# Altium PCB Power Board Schematic - Backup.PcbDoc
Units mm, origin at the board's own origin, x right, y up, seen from the top; angles counter-clockwise.
Board outline 74.35 x 72.78 mm, 2 copper layers (Top Copper, Bottom Copper), stack 1.567 mm thick; 34 components, 27 nets, 118 pads, 6 vias.
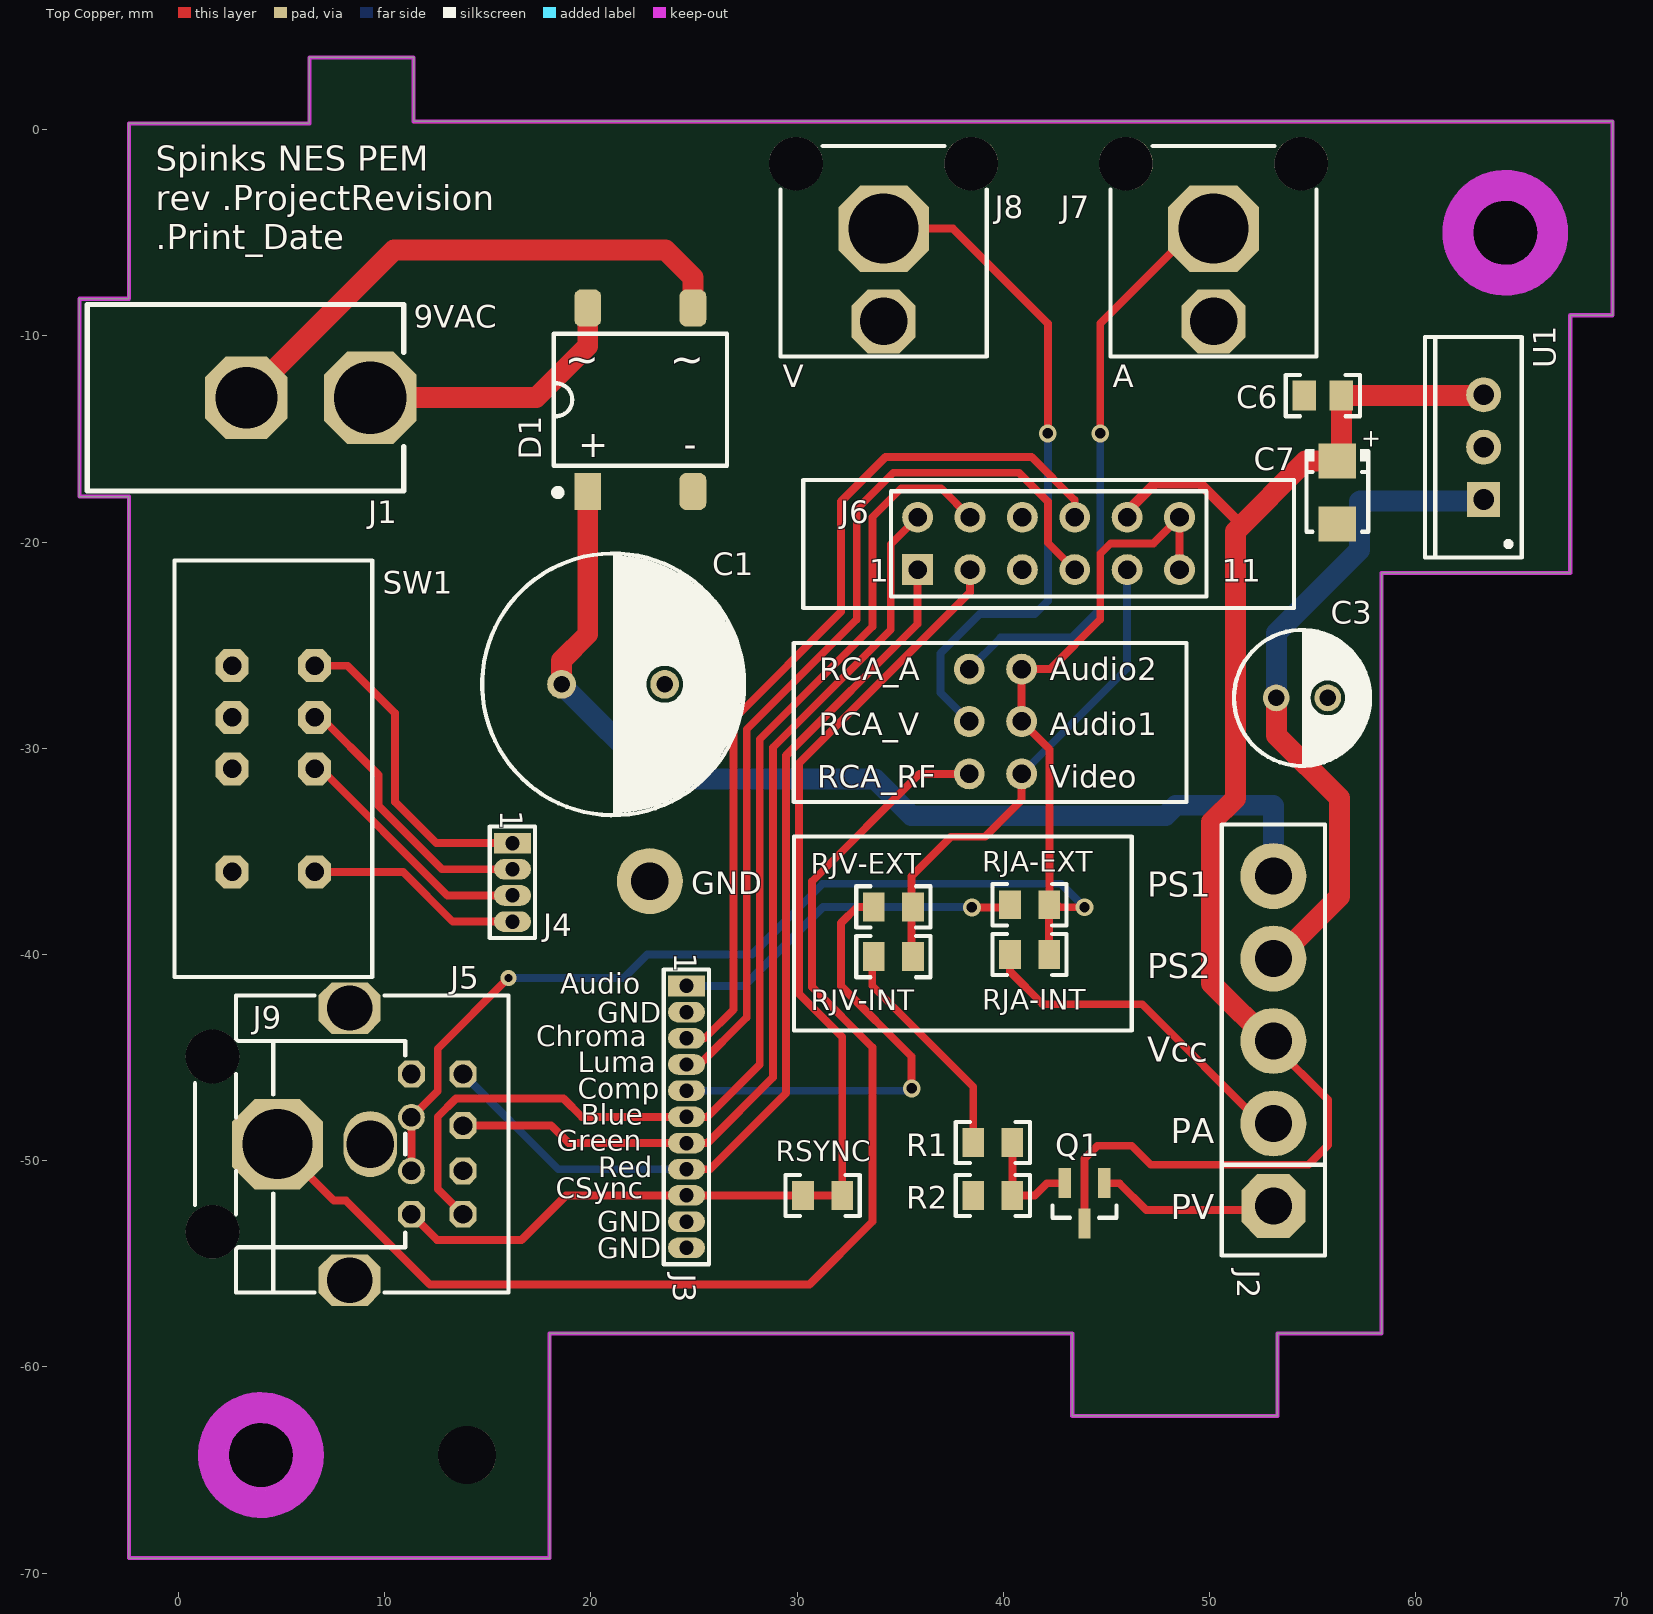
[diagram p0: Top Copper view]
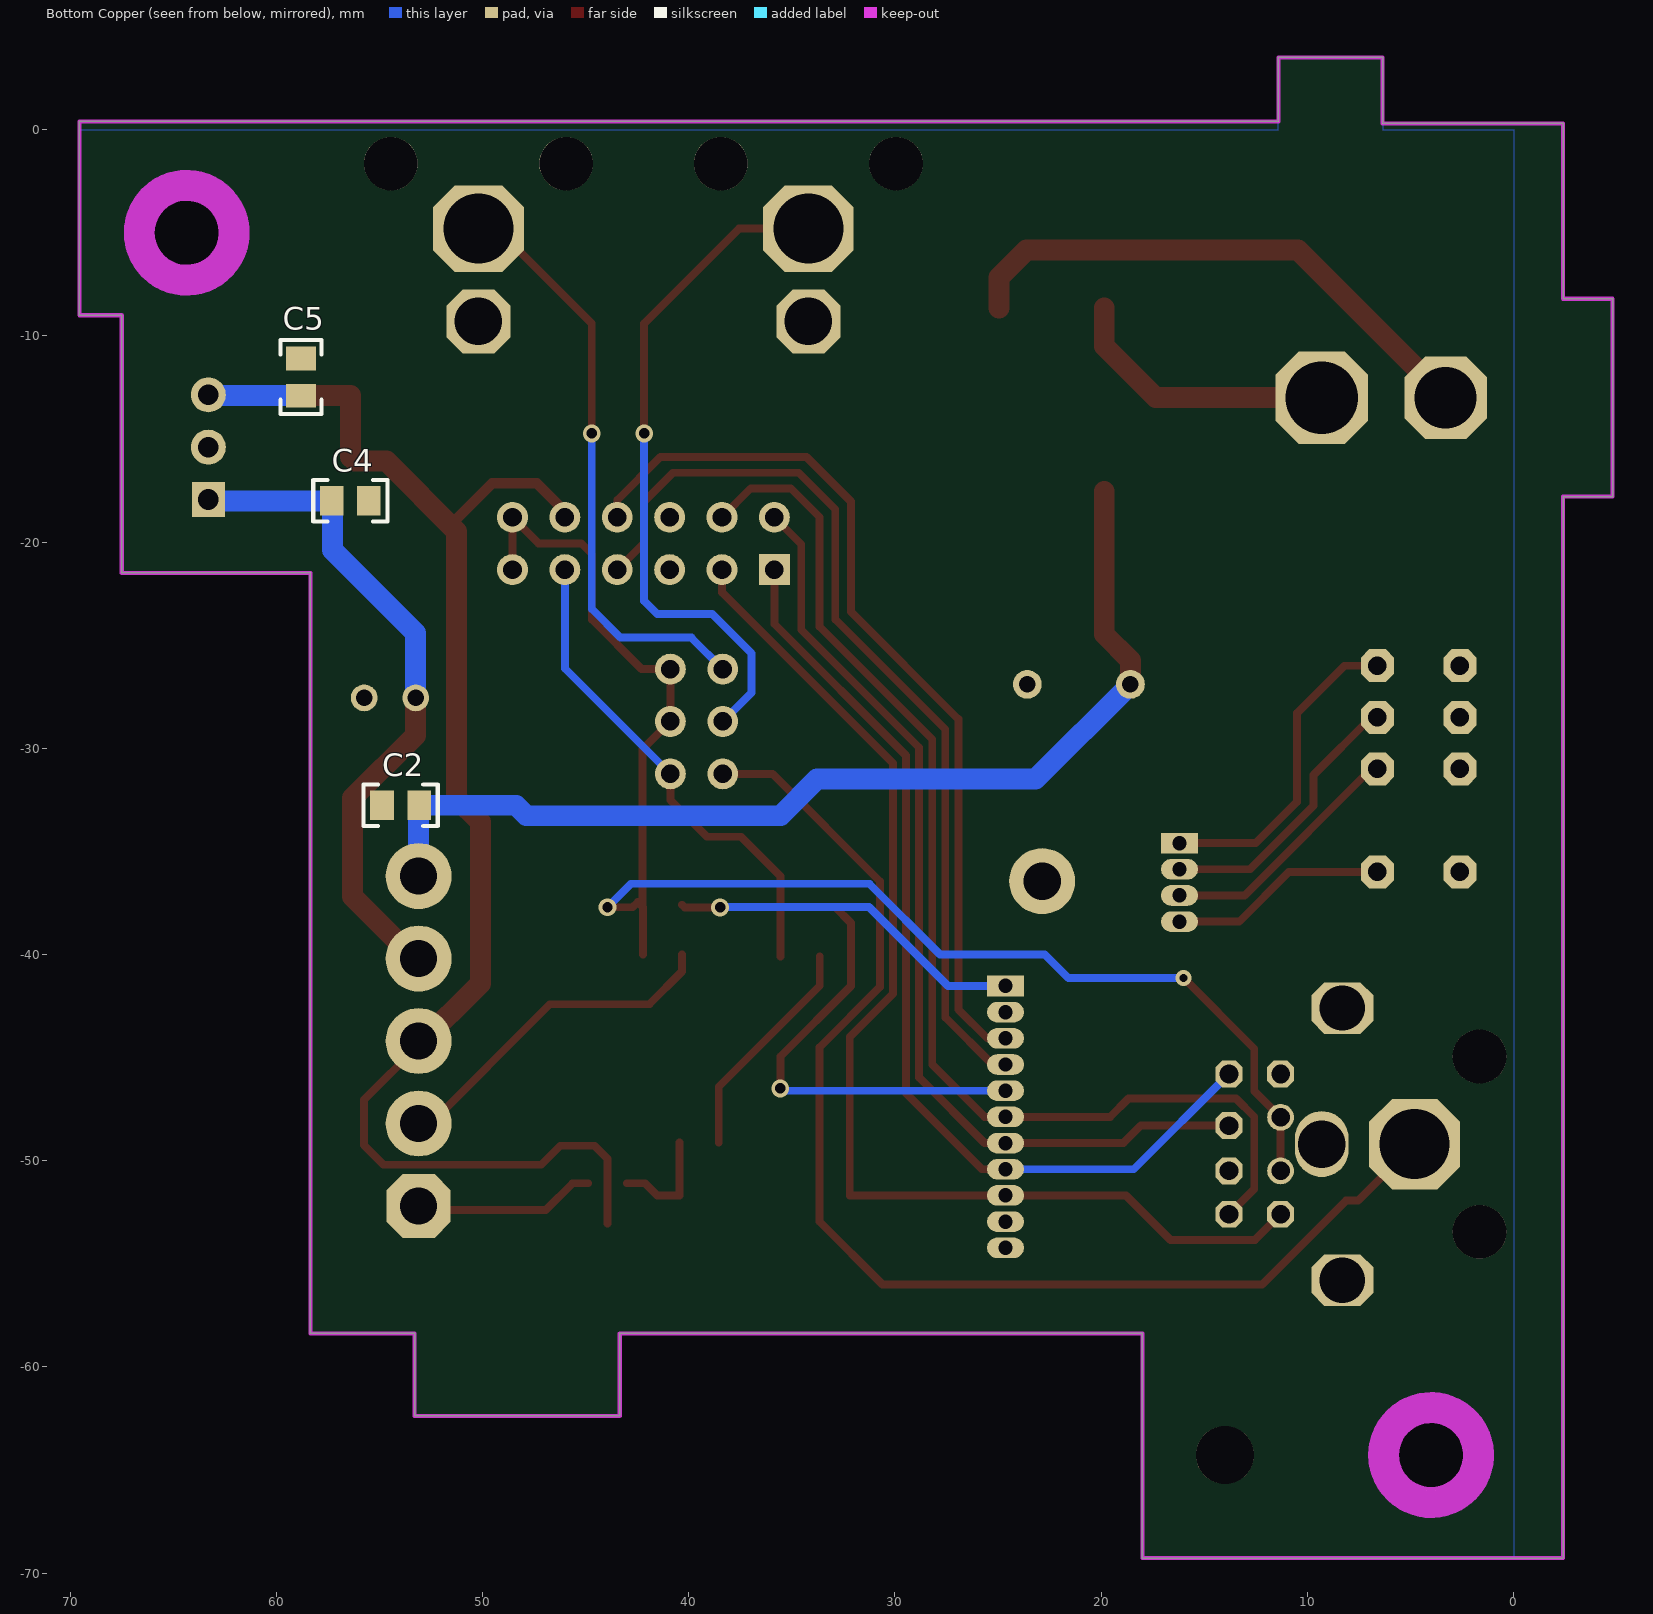
[diagram p1: Bottom Copper view, seen from below]
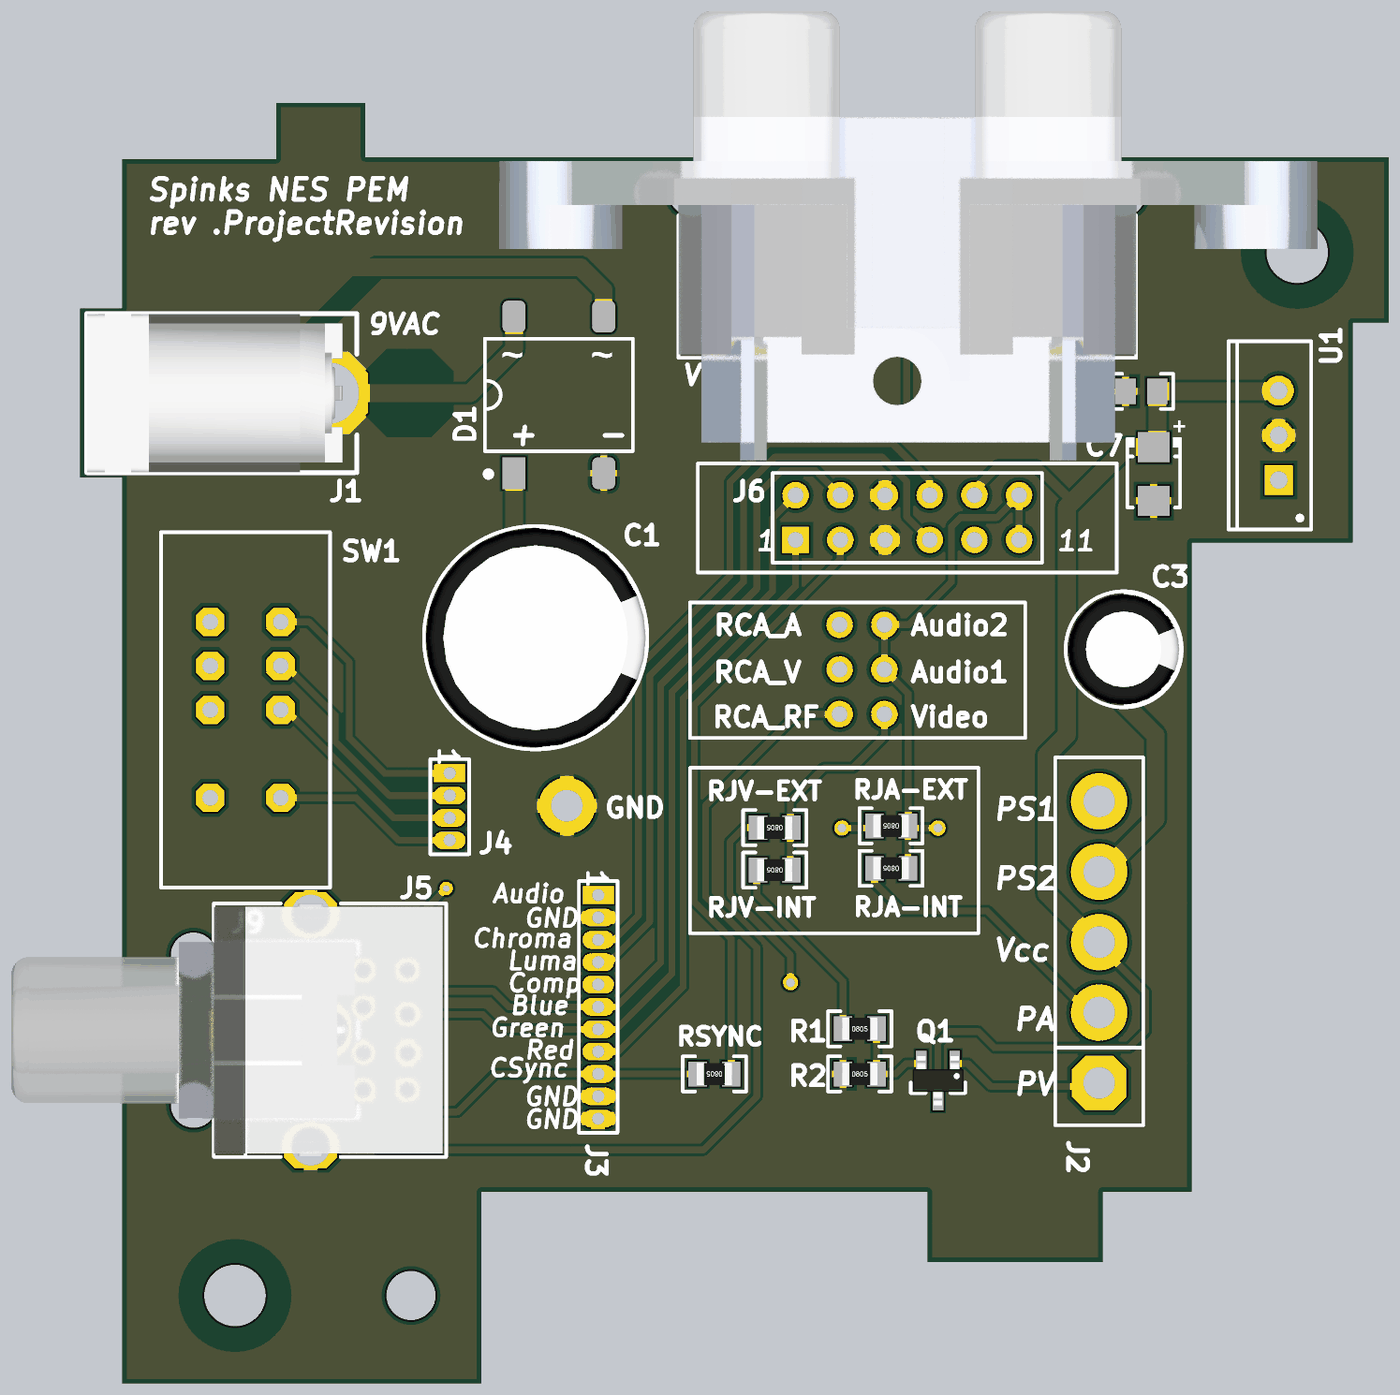
[diagram p2: 3D render of the assembled board from above, using the file's embedded part models]

## Layer stack, top to bottom
Top Solder Mask: solder mask 0.0102, Solder Resist, Dk 3.5
Top Copper: signal copper 0.0343
Dielectric 1: core 1.4986, FR-4, Dk 4.2
Bottom Copper: signal copper 0.0343
Bottom Solder Mask: solder mask 0.0102, Solder Resist, Dk 3.5

## Board outline
-2.4,-69.28 -2.4,-17.8 -4.8,-17.8 -4.8,-8.2 -2.4,-8.2 -2.4,0.3 6.35,0.3 6.35,3.5 11.4,3.5 11.4,0.4 69.55,0.4 69.55,-9 67.5,-9 67.5,-21.5 58.35,-21.5 58.35,-58.38 53.3,-58.38 53.3,-62.38 43.35,-62.38 43.35,-58.38 18,-58.38 18,-69.28

## Design rules (kind name [scope] priority, off if disabled: settings)
Clearance [All] p1: gap=0.152 except(0.267: THPad-Poly THPad-Region)
HoleSize [All] p1: absolutevalues=TRUE maxlimit=2.54 minlimit=0.381 maxpercent=80.000 minpercent=20.000
MinimumAnnularRing Via [IsVia] p1: minimumring=0.127
MinimumAnnularRing "Through Hole" [All] p2: minimumring=0.178
PolygonConnect "Via To Polygon" [IsVia] p1: connectstyle=Direct reliefconductorwidth=0.254 reliefentries=4 polygonreliefangle="90 Angle" airgapwidth=0.254
PolygonConnect "Pad to Polygon" [IsPad AND NOT OnMultiLayer] p2: connectstyle=Relief reliefconductorwidth=0.381 reliefentries=4 polygonreliefangle="90 Angle" airgapwidth=0.254
PolygonConnect "Through Hole to Polygon" [IsPad AND OnMultiLayer] p3: connectstyle=Relief reliefconductorwidth=0.762 reliefentries=4 polygonreliefangle="90 Angle" airgapwidth=0.254
PolygonConnect [All] p4: connectstyle=Relief reliefconductorwidth=0.381 reliefentries=4 polygonreliefangle="90 Angle" airgapwidth=0.254
RoutingVias [All] p1: holewidth=0.381 width=0.762 viastyle="Through Hole" minholewidth=0.381 minwidth=0.635 maxholewidth=1.016 maxwidth=1.626
SolderMaskExpansion [All] p1: expansion=0.102
Width [All] p1: maxlimit=5.08 minlimit=0.152 preferedwidth=0.381
29 further rules are at their usual default settings.

## Components (designator, comment, footprint, x,y, rotation, side; value= is the part's Value field where it differs from the comment)
Audio1 "Wire Pad" WIREPAD-09-15#1 40.894,-28.702 r180 top
Audio2 "Wire Pad" WIREPAD-09-15#1 40.894,-26.162 r180 top
C1 "Cap Aluminum" "TH CAP-12.5X25MM-A1K2" 21.082,-26.9 r0 top
C2 "Cap Ceramic" "CAP 0805_N" 53.975,-32.766 r180 bottom
C3 "Cap Aluminum" "TH CAP-6.3X11MM-A1K2" 54.492,-27.559 r0 top
C4 "Cap Ceramic" "CAP 0805_N" 56.414,-18 r0 bottom
C5 "Cap Ceramic" "CAP 0805_N" 58.804,-12 r270 bottom
C6 "Cap Ceramic" "CAP 0805_N" 55.5,-12.9 r0 top
C7 "Cap Tantalum" "CAP EIA-A (3216) A1K2" 56.2,-17.6 r270 top
D1 "DF206-ST" DFS4 22.4,-13.1 r90 top
GND "Wire Pad" WIREPAD-09-15#2 22.86,-36.449 r90 top
J1 "PJ-037A" "PWR-JCK-ALT (PJ-037A/B)" 3.3,-13 r0 top
J2 "RF Board Connector" "RF BOARD CONNECTOR" 53.1,-52.2 r90 top
J3 "1.27mm Pitch" "RF Board Mod Inputs" 24.638,-41.529 r270 top
J4 "Header 1x4 1.27mm" "HDR1X4-127MM VERT - L" 16.2,-34.6 r270 top
J5 "MD-80SM" "MINI-DIN-8-ALT (MD-80SM)" 2.8,-49.2 r90 top locked
J6 "Multiout" MULTIOUT-2 42.2,-16.6 r180 top locked
J7 "RCJ-042" "RCA-JCK-1 (RCJ-042-ALT1)"#1 50.2,-4.8 r180 top locked
J8 "RCJ-042" "RCA-JCK-1 (RCJ-042-ALT1)"#1 34.2,-4.8 r180 top locked
J9 "RCJ-042" "RCA-JCK-1 (RCJ-042-ALT1)"#2 4.8,-49.2 r270 top locked
Q1 "Transistor NPN" SOT23-3 43.942,-52.07 r270 top
R1 "Resistor" "RES 0805_N" 39.496,-49.123 r0 top
R2 "Resistor" "RES 0805_N" 39.496,-51.689 r0 top
RCA_A "Wire Pad" WIREPAD-09-15#1 38.351,-26.162 r180 top
RCA_RF "Wire Pad" WIREPAD-09-15#1 38.352,-31.242 r180 top
RCA_V "Wire Pad" WIREPAD-09-15#1 38.351,-28.702 r180 top
RJA-EXT "Resistor" "RES 0805_N" 41.275,-37.592 r180 top
RJA-INT "Resistor" "RES 0805_N" 41.275,-40.005 r180 top
RJV-EXT "Resistor" "RES 0805_N" 34.671,-37.692 r180 top
RJV-INT "Resistor" "RES 0805_N" 34.671,-40.105 r180 top
RSYNC "Resistor" "RES 0805_N" 31.242,-51.689 r180 top
SW1 "DP3T" "SW-DP3T (EG2322)" 4.6,-31 r270 top
U1 "L7805CV" TO-220AB 63.3,-15.4 r90 top
Video "Wire Pad" WIREPAD-09-15#1 40.894,-31.242 r180 top

## Footprints (in the part's own frame and the unit in brackets; to place one, negate y for a bottom-side part, rotate by r counter-clockwise, add the part's x,y. Pads: shape width x height; smd on the part's side, far side on the other; paste and mask are expansions set on the pad)
"CAP 0805_N" [mm] "Chip Capacitor, Body 2.0x1.2mm, Height 0.75mm, IPC Medium Density"
  rect 1.15x1.45 smd: 1(-0.9,0) 2(0.9,0)
  silkscreen extent -1.8,-1 1.8,1, body extent -1.1,-0.72 1.1,0.73, height 0.75
"CAP EIA-A (3216) A1K2" [mm] "Molded Capacitor, 2-Leads, Body 3.20x1.60mm, IPC Medium Density"
  rect 1.7x1.8 smd: 1(-1.525,0) 2(1.525,0)
  silkscreen extent -2.1,-1.5 1.9,1.5, body extent -1.7,-0.9 1.7,0.9, height 1.9
DFS4 [mm]
  rect 1.8x1.3 smd: 1(-4.45,2.55)
  rrect50% 1.8x1.3 smd: 2(-4.45,-2.55) 3(4.45,-2.55) 4(4.45,2.55)
  silkscreen extent -4.62,-4.2 3.2,4.2, body extent -3.25,-4.25 3.25,4.25, height 2.6
"HDR1X4-127MM VERT - L" [mm] "Connector; Header; 4 Position; 1.27mm Pitch;Vertical Mount"
  rect 1x1.8 hole 0.7: 1(0,0)
  oval 1x1.8 hole 0.7: 2(1.27,0) 3(2.54,0) 4(3.81,0)
  silkscreen extent -0.8,-1.1 4.61,1.1
"MINI-DIN-8-ALT (MD-80SM)" [mm] "CUI Inc, Mini Din Connector, Through Hole, Right Angle"
  round 1.3 hole 0.9: 1(-1.3,-8.5) 2(1.3,-8.5)
  oct 1.3x1.3 hole 0.9: 3(-3.4,-8.5) 4(-1.3,-11) 5(3.4,-8.5) 6(-3.4,-11) 7(0.9,-11) 8(3.4,-11)
  oct 2.5x3 hole 2.2: SHLD(-6.6,-5.5) SHLD(6.6,-5.5)
  silkscreen extent -7.2,-13.2 7.2,0, body extent -7.17,-13 7.17,0, height 12.8
MULTIOUT-2 [mm] "Retrofixes Mutliout Connector, Panel Mount with Through Holes"
  rect 1.5x1.5 hole 0.9 unplated paste+0: 1(6.35,4.74)
  round 1.5 hole 0.9 unplated paste+0: 2(6.35,2.2) 3(3.81,4.74) 4(3.81,2.2) 5(1.27,4.74) 6(1.27,2.2) 7(-1.27,4.74) 8(-1.27,2.2) 9(-3.81,4.74) 10(-3.81,2.2) 11(-6.35,4.74) 12(-6.35,2.2)
  silkscreen extent -11.9,0.4 11.9,6.6, body extent -23.3,-19.29 23.2,0.21, height 14.55
"PWR-JCK-ALT (PJ-037A/B)" [mm] "Round Holes; DC Power Jack; 2.1mm ID, 6.5mm OD; No Switch;"
  oct 4.5x4.5 hole 3.5: 1(6,0)
  oct 4x4 hole 3: 2(0,0)
  silkscreen extent -7.72,-4.52 7.52,4.52, body extent -7.7,-4.5 6.8,4.5, height 11.02
"RCA-JCK-1 (RCJ-042-ALT1)"#1 [mm] "RCA Phono Jack, Right Angle"
  rect 1.8x1.7 on Mech13 paste+0: 0(-4.25,-3.15) 0(4.25,-3.15)
  oct 4.4x4.2 hole 3.4: 1(0,0)
  oct 3.1x3.1 hole 2.3: 2(0,4.5)
  round 2.6 hole 2.6 unplated: MH1(-4.25,-3.15) MH2(4.25,-3.15)
  silkscreen extent -5,-4 5,6.2, body extent -5,-13.5 5,6, height 11.51
"RCA-JCK-1 (RCJ-042-ALT1)"#2 [mm] "RCA Phono Jack, Right Angle"
  rect 1.8x1.7 on Mech13 paste+0: 0(-4.25,-3.15) 0(4.25,-3.15)
  oct 4.4x4.4 hole 3.4: 1(0,0)
  oval 3.2x2.6 hole 2.3: 2(0,4.5)
  round 2.6 hole 2.6 unplated: MH1(-4.25,-3.15) MH2(4.25,-3.15)
  silkscreen extent -5,-4 5,6.2, body extent -5,-13.5 5,6, height 11.51
"RES 0805_N" [mm] "Chip Resistor, Body 2.0x1.3mm, IPC Medium Density"
  rect 1.05x1.4 smd: 1(-0.95,0) 2(0.95,0)
  silkscreen extent -1.8,-1 1.8,1, body extent -1,-0.62 1,0.63, height 0.62
"RF BOARD CONNECTOR" [mm] "connects the motherboard to the RF/power box"
  oct 3.1x3.1 hole 1.8 unplated paste+0: 1(0,0)
  round 3.2 hole 1.8 unplated paste+0: 2(4,0) 3(8,0) 4(12,0) 5(16,0)
  silkscreen extent -2.4,-2.5 18.5,2.5
"RF Board Mod Inputs" [mm] "Video and audio inputs for the RF Board Mod"
  rect 1x1.8 hole 0.7: 1(0,0)
  oval 1x1.8 hole 0.7: 2(1.27,0) 3(2.54,0) 4(3.81,0) 5(5.08,0) 6(6.35,0) 7(7.62,0) 8(8.89,0) 9(10.16,0) 10(11.43,0) 11(12.7,0)
  silkscreen extent -0.8,-1.1 13.5,1.1
SOT23-3 [mm] "SOT23, 3-Leads, Body 2.90x2.35mm, Pitch 0.95mm, IPC Medium Density"
  rect 1.45x0.6 smd: 1(-0.975,0.95) 2(-0.975,-0.95) 3(0.975,0)
  silkscreen extent 0.1,-1.55 0.7,1.55, body extent -1.4,-1.45 1.4,1.45, height 1.3
"SW-DP3T (EG2322)" [mm] "E-Switch; DP3T Slide Switch; PCB Mount Right Angle"
  oct 1.6x1.6 hole 0.9: 1(-5,-2)
  oct 1.6x1.6 hole 0.9 unplated paste+0: 2(-2.5,-2) 3(0,-2) 4(5,-2) 5(-5,2) 6(-2.5,2) 7(0,2) 8(5,2)
  silkscreen extent -10.1,-4.8 10.1,4.8, body extent -10,-11.6 10,4.65, height 10
"TH CAP-6.3X11MM-A1K2" [mm] "Aluminum Electrolytic Capacitor, Diameter 6.3mm, Height 11mm, Pitch 2.5mm"
  round 1.3 hole 0.8: 1(-1.25,0) 2(1.25,0)
  silkscreen extent -3.3,-3.3 3.3,3.3, body extent -3.15,-3.15 3.16,3.15, height 11.21
"TH CAP-12.5X25MM-A1K2" [mm] "Aluminum Electrolytic Capacitor, Diameter 12.5mm, Height 25mm, Pitch 5.0mm"
  round 1.4 hole 0.8: 1(-2.5,0) 2(2.5,0)
  silkscreen extent -6.35,-6.35 6.35,6.35, body extent -6.25,-6.25 6.26,6.25, height 25.01
TO-220AB [mm] "TO, Thru-Hole, Vertical, Heatsink Mounted; 3 In-Line Leads; Pitch 2.54 mm"
  rect 1.7x1.6 hole 1: 1(-2.54,0)
  round 1.7 hole 1: 2(0,0) 3(2.54,0)
  silkscreen extent -5.35,-1.85 5.35,2.85, body extent -5.4,-1.9 5.4,2.9, height 19.3
WIREPAD-09-15#1 [mm] "Connector; Through Hole Pad; 0.9mm Inner, 1.5mm Outer"
  round 1.5 hole 0.9: 1(0,0)
WIREPAD-09-15#2 [mm] "Connector; Through Hole Pad; 0.9mm Inner, 1.5mm Outer"
  round 3.2 hole 1.8: 1(0,0)

## Part data
Audio1 Audio2 GND RCA_A RCA_RF RCA_V Video: library part "-Wire Pad", "Wire Pad, 1 Pin, Through Hole, Vertical"
C1: library part "TH-ALUM-8-22-25V (ECA-1EHG222)", "CAP, ALUM, TH, 12.5x25mm, 2200uF, 25V, 20%, Pitch 5.0mm"
C2 C4 C5: library part 0603-X7R-3-10-50V, "CAP, CER, 0805, 10nF, 50V, X7R, 10%"
C3: library part "TH-ALUM-7-10-25V (ECA-1EM101)", "CAP, ALUM, TH, 6.3x11mm, 100uF, 25V, 20%, Pitch 2.5mm"
C6: library part 0805-X7R-4-10-50V, "CAP, CER, 0805, 0.1uF, 50V, X7R, 10%"
C7: library part "1206-TANT-6-10-16V (TAJA106K016RNJ)", "CAP, TANT,  1206, 10uF, 16V, 10%"
D1: library part "Bridge (DF206-ST)", "Full Wave Diode Bridge"
J1: library part "PWR-JCK (PJ-037A)", "2.1mm ID, DC Power Supply Connector, 2 Pin"
J2: "Motherboard Connector to RF/Power Module"
J3: library part "RF Board Mod Input Header", "Video and audio inputs for the RF Board Mod"
J4: library part "Header 1x4 - 1.27mm Vert", "Header, 4 Pin, 1.27mm Pitch, Vertical"
J5: library part "Mini-XRGB (MD-80SM)", "8 Pin Mini DIN Connector, Shielded, Through Hole, Right Angle"
J6: library part "Multiout Connector", "SNES Multiout Connector"
J7 J8 J9: library part "RCA-JCK-1 (RCJ-042)", "RCA Phono Jack, Right Angle"
Q1: library part "BC817 NPN", "General Purpose Transistor, NPN, 3-Pin, B1E2C3"
R1 R2 RJA-EXT RJA-INT RJV-EXT RJV-INT RSYNC: library part -Resistor, "RES, SMD"
SW1: library part "SW-DP3T (EG2322)", "Dual Pole, Three Throw"
U1: "Fixed 5V Regulator, 1.5A, Through Hole"

## Free pads (board coordinates)
  round 3.5 hole 3.5 unplated paste+0: MH(4,-64.28) MH(64.35,-5)
  round 2.8 hole 2.8 unplated paste+0: MH(14,-64.28)

## Via types
v1: diameter 0.864, hole 0.508, Top Copper to Bottom Copper, 5 vias
v2: diameter 0.762, hole 0.381, Top Copper to Bottom Copper, 1 vias

## Nets (pads, with @x,y where several pads share a name; then routed paths per layer and width w, separated by ;. In a path a pad name is that pad's centre, name@x,y a point inside that pad or via, vN(x,y) a via of type N, cw(c..) or ccw(c..) an arc to the next point about the centre after c; other vN are vias at no path point)
+5V: C5.2 C6.2 C7.1 J2.3 J6.10 Q1.3 U1.3 | length 76.9
  Top Copper w0.381: Q1.3 43.942,-49.911 44.577,-49.276 46.228,-49.276 47.152,-50.2 54.8,-50.2 55.75,-49.25 55.75,-47.05 J2.3@53.1,-44.4
  Top Copper w0.508: J6.10 46.01,-18.506 47.371,-17.145 49.53,-17.145 51.562,-19.177
  Top Copper w1.016: J2.3@53.1,-44.4 50.11,-41.41 50.11,-33.583 51.26,-32.433 51.26,-19.479 54.664,-16.075 C7.1 56.4,-15.875 C6.2 63.26,-12.9 U1.3
  Bottom Copper w1.016: C5.2 63.26,-12.9 U1.3
"AUDIO OUT": Audio1.1 Audio2.1 J5.1 J5.2 J6.11 J6.12 RJA-EXT.1 RJA-INT.1 | length 73
  Top Copper w0.381: J5.1 J5.2 12.573,-46.627 12.573,-44.577 v2(16.002,-41.148) ; RJA-INT.1 42.225,-37.715 RJA-EXT.1@42.248,-37.692 ; v1(43.942,-37.715) 42.725,-37.715 42.475,-37.465 RJA-EXT.1@42.248,-37.692 ; J6.11 J6.12 47.284,-20.066 45.212,-20.066 44.704,-20.574 44.704,-23.749 42.291,-26.162 Audio2.1 Audio1.1 42.248,-30.056 RJA-EXT.1@42.248,-37.692
  Bottom Copper w0.381: v2(16.002,-41.148) 21.59,-41.148 22.733,-40.005 27.813,-40.005 31.242,-36.576 42.803,-36.576 v1(43.942,-37.715)
BLUE: J3.6 J5.6 J6.4 | length 57.7
  Top Copper w0.381: J5.6 12.573,-51.373 12.573,-47.879 13.462,-46.99 18.67,-46.99 19.559,-47.879 J3.6 25.654,-47.879 28.194,-45.339 28.194,-29.567 33.655,-24.106 33.655,-18.796 35.052,-17.399 36.989,-17.399 J6.4 J6.4@38.39,-18.451
CHROMA: J3.3 J6.8 | length 43.6
  Top Copper w0.381: J3.3 25.527,-44.069 26.924,-42.672 26.924,-28.588 32.131,-23.381 32.131,-18.034 34.29,-15.875 41.378,-15.875 43.47,-17.967 J6.8
CSYNC: J3.9 J5.3 J6.3 RSYNC.1 RSYNC.2 | length 57
  Top Copper w0.381: J5.3 12.548,-53.848 16.638,-53.848 18.797,-51.689 J3.9 RSYNC.2 RSYNC.1 32.192,-44.003 30.099,-41.91 30.099,-30.731 38.39,-22.44 J6.3
GND: C1.2 C2.1 C3.2 C4.1 C5.1 C6.1 C7.2 D1.2 GND.1 J3.2 J3.10 J3.11 J5.4 J5.SHLD J6.5 J6.6 J7.2 J8.2 J9.2 R2.1 U1.2
GREEN: J3.7 J5.7 J6.2 | length 46.8
  Top Copper w0.381: J5.7 18.075,-48.3 18.924,-49.149 J3.7 25.654,-49.149 28.829,-45.974 28.829,-29.972 34.544,-24.257 34.544,-20.106 J6.2
LUMA: J3.4 J6.7 | length 45.1
  Top Copper w0.381: J3.4 25.273,-45.339 27.559,-43.053 27.559,-29.083 32.893,-23.749 32.893,-18.415 34.671,-16.637 40.767,-16.637 42.164,-18.034 42.164,-20.034 J6.7
NetC1_1: C1.1 C2.2 D1.1 J2.5 | length 50.9
  Top Copper w1.016: C1.1 18.582,-25.741 19.85,-24.473 D1.1
  Bottom Copper w1.016: C1.1 23.178,-31.496 33.782,-31.496 35.56,-33.274 47.879,-33.274 48.387,-32.766 C2.2 53.1,-32.791 J2.5@53.1,-36.4
NetC3_1: C3.1 C4.2 J2.4 U1.1 | length 32.4
  Top Copper w1.016: J2.4@53.1,-40.4 56.3,-37.2 56.3,-32.424 53.25,-29.374 C3.1@53.25,-27.559
  Bottom Copper w1.016: J2.4@53.1,-40.4 J2.4@53.199,-40.4 ; C3.1@53.25,-27.2 53.25,-24.421 57.288,-20.383 57.288,-18.026 C4.2 63.24,-18 U1.1
NetD1_3: D1.3 J1.2 | length 26.6
  Top Copper w1.016: J1.2 10.458,-5.842 23.622,-5.842 24.95,-7.17 D1.3
NetD1_4: D1.4 J1.1 | length 13.4
  Top Copper w1.016: J1.1 17.353,-13 19.85,-10.503 D1.4
NetJ2_1: J2.1 Q1.1 | length 8.9
  Top Copper w0.381: Q1.1 45.634,-51.095 46.939,-52.4 J2.1@53.3,-52.4
NetJ2_2: J2.2 RJA-INT.2 | length 17.7
  Top Copper w0.381: RJA-INT.2 40.325,-40.833 41.91,-42.418 46.736,-42.418 52.718,-48.4 J2.2@54.089,-48.4
NetJ3_1: J3.1 RJA-EXT.2 | length 17.3
  Top Copper w0.381: v1(38.481,-37.719) 40.198,-37.719 RJA-EXT.2
  Bottom Copper w0.381: J3.1 27.432,-41.529 31.256,-37.705 38.467,-37.705 v1(38.481,-37.719)
NetJ3_5: J3.5 RJV-EXT.2 | length 22.3
  Top Copper w0.381: RJV-EXT.2 32.92,-37.692 32.131,-38.481 32.131,-41.529 35.56,-44.958 v1(35.56,-46.501)
  Bottom Copper w0.381: J3.5 35.452,-46.609 v1(35.56,-46.501)
NetJ4_1: J4.1 SW1.5 | length 15.7
  Top Copper w0.381: SW1.5 8.2,-26 10.5,-28.3 10.5,-32.6 12.5,-34.6 J4.1
NetJ4_2: J4.2 SW1.6 | length 13.2
  Top Copper w0.381: SW1.6@6.9,-28.5 9.7,-31.3 9.7,-32.788 12.782,-35.87 J4.2
NetJ4_3: J4.3 SW1.7 | length 12.1
  Top Copper w0.381: SW1.7@6.75,-30.85 13.04,-37.14 J4.3
NetJ4_4: J4.4 SW1.8 | length 10.6
  Top Copper w0.381: SW1.8 10.9,-36 13.31,-38.41 J4.4
NetJ7_1: J7.1 RCA_A.1 | length 28.9
  Top Copper w0.381: RCA_A.1 RCA_A.1@38.481,-26.162 ; v1(44.704,-14.732) 44.704,-9.398 49.302,-4.8 J7.1
  Bottom Copper w0.381: RCA_A.1 39.875,-24.638 43.307,-24.638 44.704,-23.241 v1(44.704,-14.732)
NetJ8_1: J8.1 RCA_V.1 | length 33.8
  Top Copper w0.381: J8.1 37.566,-4.8 42.164,-9.398 v1(42.164,-14.732) ; RCA_V.1@37.973,-28.702 RCA_V.1
  Bottom Copper w0.381: RCA_V.1 36.957,-27.308 36.957,-25.4 38.862,-23.495 41.529,-23.495 42.164,-22.86 v1(42.164,-14.732)
NetJ9_1: J9.1 RCA_RF.1 | length 60.4
  Top Copper w0.381: J9.1 7.543,-51.943 8.128,-51.943 12.192,-56.007 30.607,-56.007 33.655,-52.959 33.655,-44.505 30.734,-41.584 30.734,-36.449 35.941,-31.242 RCA_RF.1
NetQ1_2: Q1.2 R1.2 R2.2 | length 5.4
  Top Copper w0.381: R1.2 R2.2 41.529,-51.689 42.123,-51.095 Q1.2
NetR1_1: R1.1 RJV-INT.2 | length 11
  Top Copper w0.381: RJV-INT.2@33.648,-40.105 33.648,-41.522 38.546,-46.42 R1.1
RED: J3.8 J5.8 J6.1 | length 47.1
  Top Copper w0.381: J3.8 25.781,-50.419 29.464,-46.736 29.464,-30.353 35.85,-23.967 J6.1
  Bottom Copper w0.381: J5.8 18.419,-50.419 J3.8
"VIDEO OUT": J6.9 RJV-EXT.1 RJV-INT.1 Video.1 | length 24.2
  Top Copper w0.381: RJV-INT.1@35.548,-40.105 35.548,-37.705 35.548,-36.207 37.465,-34.29 39.116,-34.29 40.894,-32.512 Video.1 Video.1@41.021,-31.115
  Bottom Copper w0.381: Video.1 46.01,-26.126 J6.9
pads on no net: J5.5 J7.0 J7.MH1 J7.MH2 J8.0 J8.MH1 J8.MH2 J9.0 J9.MH1 J9.MH2 SW1.1 SW1.2 SW1.3 SW1.4

## Polygon pours and split planes (outlines as drawn)
GND on Top Copper "Top Ground Plane" (solid, shelved, pour order 0): -2.4,-69.28 18,-69.28 18,-58.38 43.35,-58.38 43.35,-62.38 53.3,-62.38 53.3,-58.38 58.35,-58.38 58.35,-21.5 67.5,-21.5 67.5,-9 69.55,-9 69.55,0.3 11.4,0.3 11.4,3.5 6.35,3.5 6.35,0.3 -2.4,0.3 -2.4,-8.2 -4.8,-8.2 -4.8,-17.8 -2.4,-17.8
GND on Bottom Copper "Bottom Ground Plane" (solid, shelved, pour order 1): 0,-69.28 18,-69.28 18,-58.38 43.35,-58.38 43.35,-62.38 53.3,-62.38 53.3,-58.38 58.35,-58.38 58.35,-21.5 67.5,-21.5 67.5,-9 69.55,-9 69.55,0 11.4,0 11.4,3.5 6.35,3.5 6.35,0 0,0

## Keep-outs
Keep-Out Layer:
  circle w1.5: c64.35,-5 r2.3
  circle w1.5: c4,-64.28 r2.3
  lines w0.2: -4.8,-17.8 -2.4,-17.8 -2.4,-69.28 18,-69.28 18,-58.38 26.156,-58.38 43.35,-58.38 43.35,-62.38 53.3,-62.38 53.3,-58.38 58.35,-58.38 58.35,-21.5 67.5,-21.5 67.5,-9 69.55,-9 69.55,0.4 11.4,0.4 11.4,3.5 6.35,3.5 6.35,0.3 -2.4,0.3 -2.4,-8.2 -4.8,-8.2 -4.8,-17.8

## Silkscreen, mask and mechanical layers (free items; w line width, h text height)
Top Silkscreen:
  lines w0.2: 2.8,-56.4 6.6,-56.4 ; 2.8,-54.5 2.8,-54.3 2.9,-54.2 ; 2.8,-52.6 2.8,-50.5 ; 2.8,-47.9 2.8,-45.8 ; 2.9,-44.2 2.8,-44.1 2.8,-42 6.6,-42 ; 4.6,-46.8 4.6,-44.3 ; 10,-42 16,-42 ; 11,-54.2 11,-53.5 ; 11,-49.7 11,-48.7 ; 11,-44.9 11,-44.2 ; 16,-56.4 10,-56.4 ; 6.6,-56.4 6.6,-56.4 ; 10,-56.4 10,-56.4 ; 29.842,-32.6 48.892,-32.6 48.892,-24.897 29.842,-24.897 29.842,-32.6 ; 29.851,-43.688 46.234,-43.688 46.234,-34.29 29.851,-34.29 29.851,-43.688
  lines w0.254: 10.924,-17.521 10.924,-15.367 ; 10.924,-10.795 10.924,-8.479
  text "Spinks NES PEM" at -1.1,-2 h1.2
  text "rev .ProjectRevision" at -1.1,-3.9 h1.2
  text ".Print_Date" at -1.1,-5.8 h1.2
  text "9VAC" at 11.4,-9.6 h1.1
  text "V" at 29.3,-12.5 h1.1
  text "A" at 45.3,-12.5 h1.1
  text "PS1" at 46.99,-37.211 h1.2
  text "PS2" at 46.99,-41.148 h1.2
  text "Audio" at 18.522,-41.91 h1
  text "GND" at 20.32,-43.307 h1
  text "Chroma" at 17.355,-44.45 h1
  text "Vcc" at 46.99,-45.212 h1.2
  text "Luma" at 19.355,-45.72 h1
  text "Comp" at 19.355,-46.99 h1
  text "Blue" at 19.521,-48.26 h1
  text "PA" at 48.133,-49.149 h1.2
  text "Green" at 18.355,-49.53 h1
  text "Red" at 20.354,-50.8 h1
  text "CSync" at 18.288,-51.816 h1
  text "PV" at 48.133,-52.832 h1.2
  text "GND" at 20.32,-53.45 h1
  text "GND" at 20.32,-54.737 h1
M1 Board Outline:
  lines w0.2: -4.8,-17.8 -4.8,-8.2 -2.4,-8.2 -2.4,0.3 6.35,0.3 6.35,3.5 11.4,3.5 11.4,0.4 69.55,0.4 69.55,-9 67.5,-9 67.5,-21.5 58.35,-21.5 58.35,-58.38 53.3,-58.38 53.3,-62.38 43.35,-62.38 43.35,-58.38 26.156,-58.38 18,-58.38 18,-69.28 -2.4,-69.28 -2.4,-17.8 -4.8,-17.8
Mechanical 13:
  lines w0.2: -2.4,-58.4 18,-58.4
  lines w0.254: 58.35,-21.5 58.35,0 ; 58.4,-8.98 67.5,-8.98

## Text inside footprints (layer, text, board x,y; h text height)
C7: Top Silkscreen "+" at 57.2,-14.5 h1.5 r270
D1: Top Silkscreen "~" at 25.5,-10.1 h2.5 r180; Top Silkscreen "+" at 19.4,-15.9 h1.27; Top Silkscreen "-" at 24.5,-15.9 h1.27; Top Silkscreen "~" at 20.4,-10.1 h2.5 r180
J3: Top Silkscreen "1" at 24.038,-39.929 h1.1 r270
J4: Top Silkscreen "1" at 15.6,-33 h1.1 r270
J6: Top Silkscreen "1" at 33.5,-21.92 h1.1; Top Silkscreen "11" at 50.6,-21.92 h1.1